# Altium PCB OPA847.PcbDoc
Units mil, origin at the board's own origin, x right, y up, seen from the top; angles counter-clockwise.
Board outline 1305 x 1265 mil, 2 copper layers (Top Layer, Bottom Layer); 20 components, 9 nets, 49 pads, 32 vias.
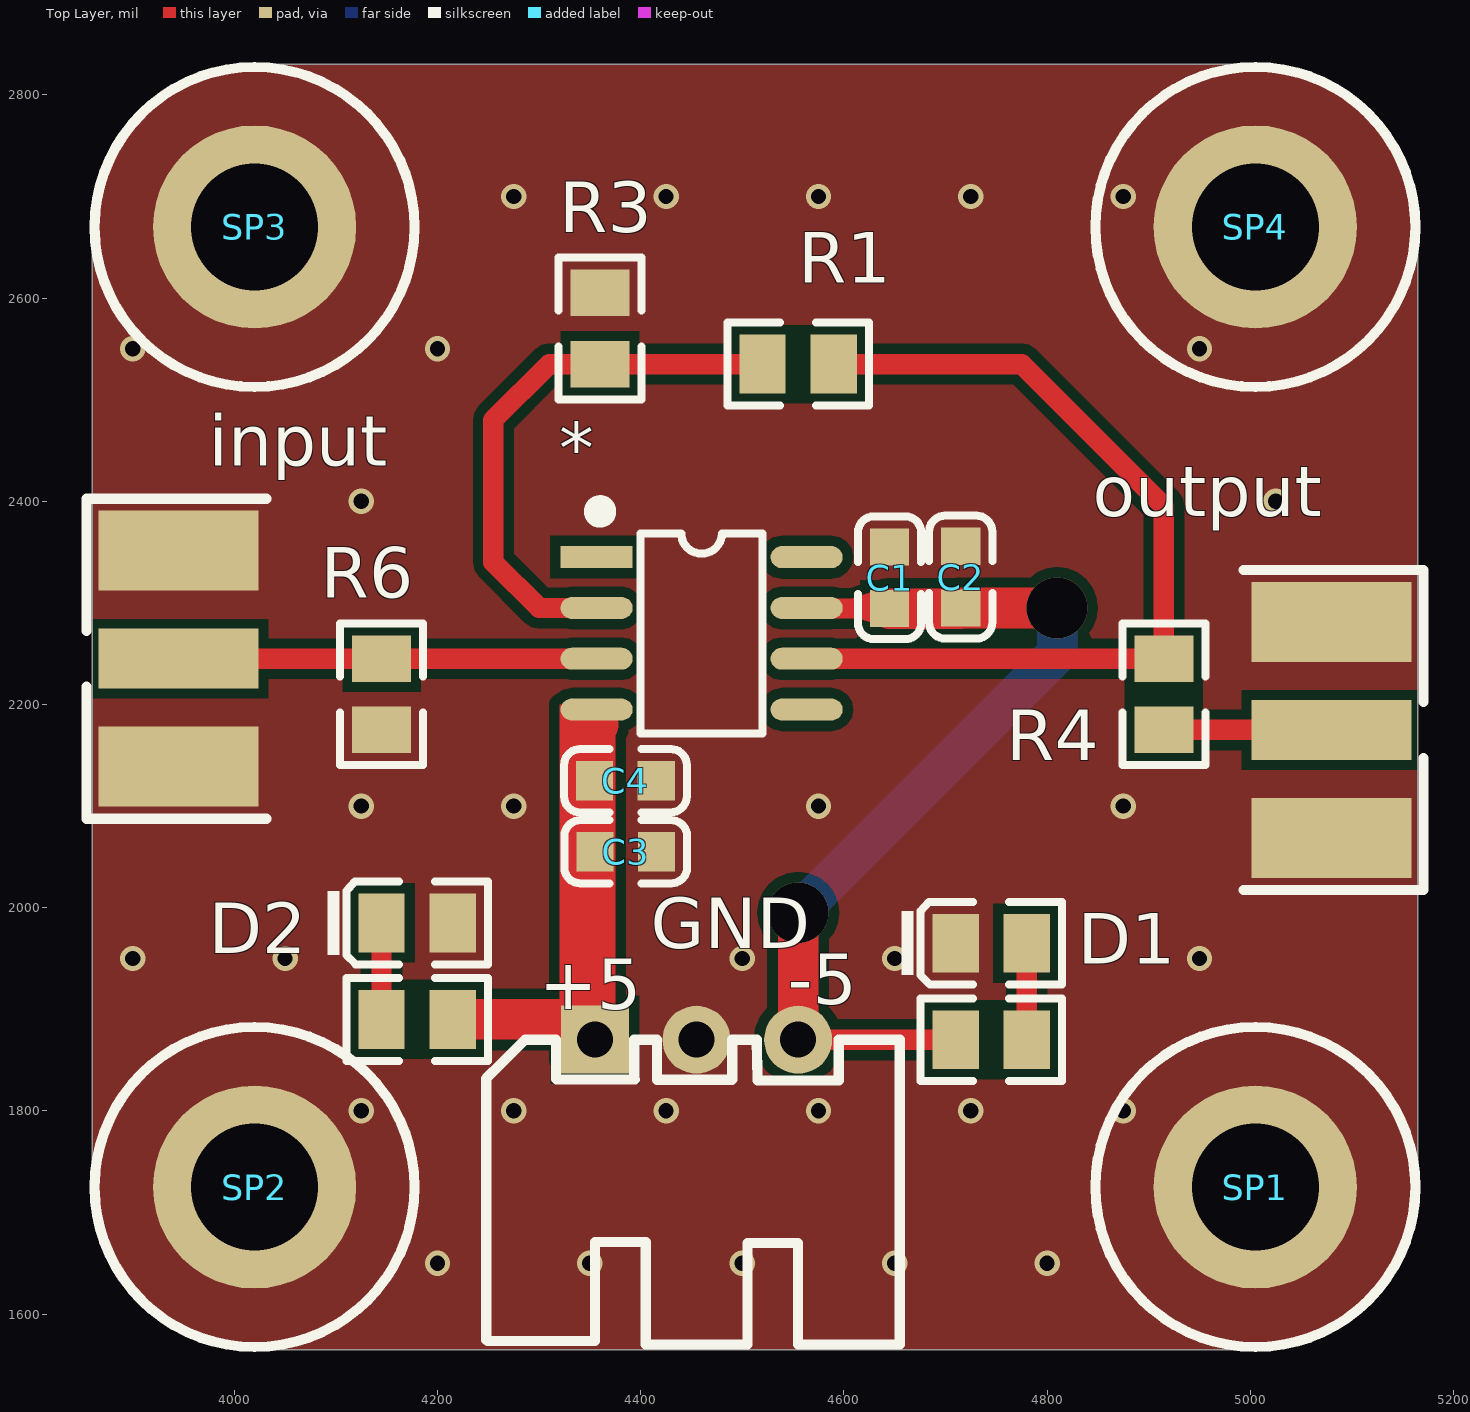
[diagram p0: Top Layer view]
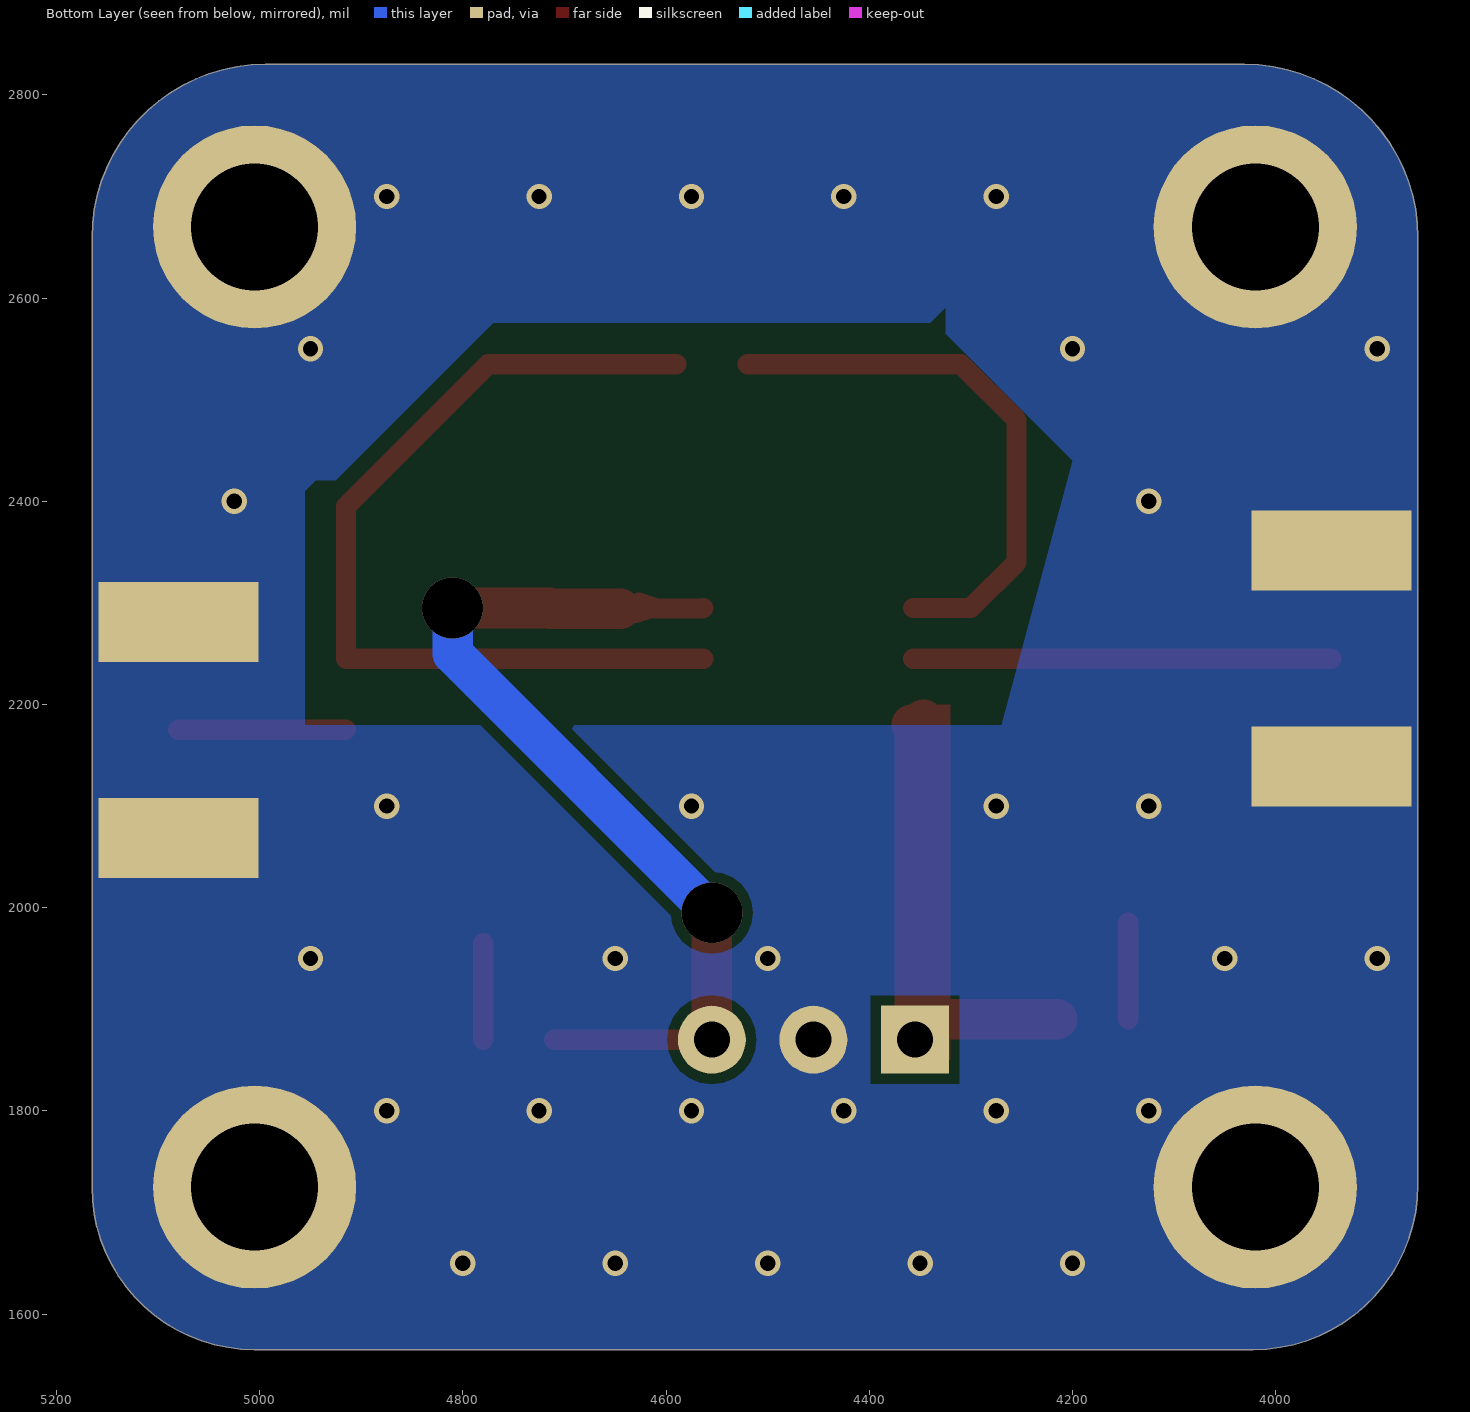
[diagram p1: Bottom Layer view, seen from below]
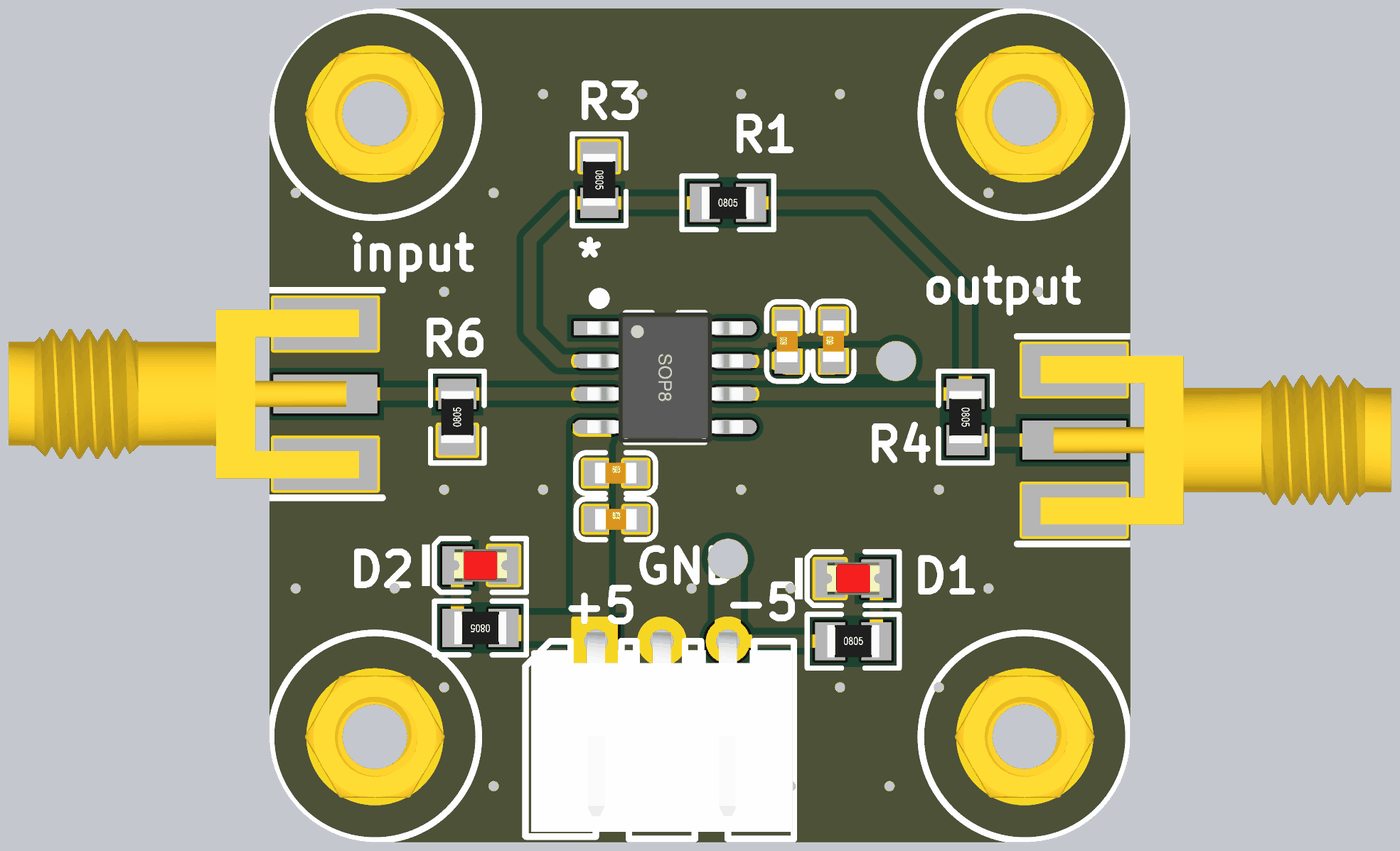
[diagram p2: 3D render of the assembled board from above, using the file's embedded part models]

## Layer stack, top to bottom
Top Solder: solder mask 0.4, Solder Resist, Dk 3.5
Top Layer: signal copper 1.4
Dielectric 1: dielectric 12.6, FR-4, Dk 4.8
Bottom Layer: signal copper 1.4
Bottom Solder: solder mask 0.4, Solder Resist, Dk 3.5

## Board outline
3860,1727.08 ccw(c4022.08,1727.08) 4022.08,1565 5005.19,1565 ccw(c5005.19,1724.81) 5165,1724.81 5165,2659.29 ccw(c4994.29,2659.29) 4994.29,2830 4030.71,2830 ccw(c4030.71,2659.29) 3860,2659.29

## Design rules (kind name [scope] priority, off if disabled: settings)
Clearance [All] p1: gap=10 ignorepadtopadclearanceinfootprint=FALSE except(0: Arc-Hole Track-Hole SMDPad-Hole THPad-Hole Via-Hole Fill-Hole Poly-Hole Region-Hole Text-Hole)
PolygonConnect [All] p1: connectstyle=Direct reliefconductorwidth=10 reliefentries=4 polygonreliefangle="90 Angle" airgapwidth=10
RoutingVias [All] p1: holewidth=28 width=50 viastyle="Through Hole" minholewidth=28 minwidth=50 maxholewidth=28 maxwidth=50
SolderMaskExpansion [All] p1: expansion=4
Width [All] p1: maxlimit=50 minlimit=10 preferedwidth=10 minimp=50.000000 maximp=50.000000 favimp=50.000000
30 further rules are at their usual default settings.

## Components (designator, comment, footprint, x,y, rotation, side; value= is the part's Value field where it differs from the comment)
* "Component_1" SOP8_N 4460,2270 r0 top
+5 "2KΩ (2001) ±1%" 0805_R 4180,1890 r180 top (schematic designator R5)
-5 "2KΩ (2001) ±1%" 0805_R 4745.04,1870 r0 top (schematic designator R2)
C1 "2.0pF (020) 0.25pF 50V" 0603_C 4645,2324.68 r90 top
C2 "2.0pF (020) 0.25pF 50V" 0603_C 4715,2325.32 r90 top
C3 "2.0pF (020) 0.25pF 50V" 0603_C 4385.31,2055 r0 top
C4 "2.0pF (020) 0.25pF 50V" 0603_C 4385,2125 r0 top
D1 "红灯 0805" 0805_LED_S1 4745,1965 r0 top
D2 "红灯 0805" 0805_LED_S1 4180,1985 r0 top
GND "HDR-1X3" XH2.54-WI-3P 4455,1870 r0 top (schematic designator JP3)
input "SMA WIFI 天线接口" SMA-KE 3945,2245 r90 top (schematic designator JP1)
output "SMA WIFI 天线接口" SMA-KE 5080,2175 r270 top (schematic designator JP2)
R1 "2KΩ (2001) ±1%" 0805_R 4554.96,2535 r0 top
R3 "2KΩ (2001) ±1%" 0805_R 4360,2570.04 r270 top
R4 "2KΩ (2001) ±1%" 0805_R 4915,2210.04 r270 top
R6 "2KΩ (2001) ±1%" 0805_R 4145,2209.96 r90 top
SP1 "M3铜柱" M3x4_L 5005,1725 r0 top
SP2 "M3铜柱" M3x4_L 4020,1725 r0 top
SP3 "M3铜柱" M3x4_L 4020,2670 r0 top
SP4 "M3铜柱" M3x4_L 5005,2670 r0 top

## Footprints (in the part's own frame and the unit in brackets; to place one, negate y for a bottom-side part, rotate by r counter-clockwise, add the part's x,y. Pads: shape width x height; smd on the part's side, far side on the other; paste and mask are expansions set on the pad)
0603_C [mm]
  rect 0.93x0.98 smd: 1(-0.77,0) 2(0.77,0)
  silkscreen extent -1.53,-0.79 1.54,0.79, body extent -0.8,-0.4 0.8,0.4, height 0.3
0805_LED_S1 [mm]
  rect 1.16x1.47 smd: A(0.89,0) K(-0.89,0)
  silkscreen extent -2.24,-1.04 1.77,1.03, body extent -1.01,-0.62 1.01,0.62, height 1.1
0805_R [mm]
  rect 1.16x1.47 smd: 1(-0.89,0) 2(0.89,0)
  silkscreen extent -1.77,-1.04 1.77,1.03, body extent -1,-0.62 1,0.63, height 0.49
M3x4_L [mil] "M3铜柱，长：4mm"
  round 200 hole 125: 1(0,0)
  silkscreen extent -157,-157 157,157, body extent -106,-93 106,93, height 159
SMA-KE [mm] "SMA 偏脚射频天线座     淘宝ID:黄晶宝石"
  rect 1.5x4 smd: 1(0,0)
  rect 2x4 smd: 2(-2.7,0) 2(2.7,0)
  rect 2x4 smd far side: 3(-2.7,0) 3(2.7,0)
  silkscreen extent -4,-2.2 4,2.3, body extent -3.25,-1.3 3.25,12.2, height 3.75
SOP8_N [mm] "5*6*1.8mm（长宽高）"
  rect 1.8x0.55 smd: 1(-2.625,1.905)
  oval 1.8x0.55 smd: 2(-2.625,0.635) 3(-2.625,-0.635) 4(-2.625,-1.905) 5(2.625,-1.905) 6(2.625,-0.635) 7(2.625,0.635) 8(2.625,1.905)
  silkscreen extent -2.69,-2.5 1.52,3.2, body extent -3,-2.5 3,2.5, height 1.9
XH2.54-WI-3P [mm] "接插件，3P"
  rect 1.7x1.7 hole 0.9: 1(-2.54,0)
  round 1.7 hole 0.9: 2(0,0) 3(2.54,0)
  silkscreen extent -5.26,-7.62 5.08,0, body extent -5.04,-7.35 5.04,0.35, height 5.73

## Part data
+5 -5 R1 R3 R4 R6: library part "0805 2KΩ (2001) 1%", "贴片电阻", Package=0805, SuppliersPartNumber=C17604, ComponentLink1Description=供应商链接, ComponentLink1URL=http://www.szlcsc.com/product/details_18292.html, Supplier=LC
C1 C2 C3 C4: library part "0603 2.0pF (020) 0.25pF 50V", "贴片电容", Package=0603, SuppliersPartNumber=C21895, ComponentLink1Description=供应商链接, ComponentLink1URL=http://www.szlcsc.com/product/details_22617.html, Supplier=LC
D1 D2: library part "0805 红灯", "发光二极管", Package=0805, SuppliersPartNumber=C2295, ComponentLink1Description=供应商链接, ComponentLink1URL=http://www.szlcsc.com/product/details_2668.html, Supplier=LC
GND: library part "Header 3", "3P接插件", BOM名称=3P接插件
input output: library part SMA, "SMA-2.4G射频天线接口"
SP1 SP2 SP3 SP4: library part 铜柱小焊盘, "铜柱"

## Via types
v1: diameter 25, hole 15, Top Layer to Bottom Layer, tented both sides, 30 vias
v2: diameter 60, hole 60, Top Layer to Bottom Layer, tented both sides, 2 vias

## Nets (pads, with @x,y where several pads share a name; then routed paths per layer and width w, separated by ;. In a path a pad name is that pad's centre, name@x,y a point inside that pad or via, vN(x,y) a via of type N, cw(c..) or ccw(c..) an arc to the next point about the centre after c; other vN are vias at no path point)
+5: *.7 -5.1 C1.1 C2.1 GND.3 | length 932.8
  Top Layer w20: GND.3 -5.1 ; *.7 4563.98,2294.37 C1.1
  Top Layer w40: GND.3 v2(4555,1995) ; C1.1 4714.37,2294.37 C2.1 v2(4810,2295)
  Bottom Layer w40: v2(4555,1995) 4810,2250 v2(4810,2295)
-5: *.4 +5.1 C3.1 C4.1 GND.1 | length 471.4
  Top Layer w40: +5.1 4335,1890 GND.1 C3.1 4355,2176.65 ; *.4@4346.65,2185 4355,2176.65 ; 4358.35,2180 4355,2176.65
GND: C1.2 C2.2 C3.2 C4.2 D1.K D2.A GND.2 input.2 input.3 output.2 output.3 R3.1 R6.1 SP1.1 SP2.1 SP3.1 SP4.1
  other v1: 4200,1650 4350,1650 4500,1650 4650,1650 4800,1650 4125,1800 4275,1800 4425,1800 4575,1800 4725,1800 4875,1800 3900,1950 4050,1950 4500,1950 4650,1950 4950,1950 4125,2100 4275,2100 4575,2100 4875,2100 4125,2400 5025,2400 3900,2550 4200,2550 4950,2550 4275,2700 4425,2700 4575,2700 4725,2700 4875,2700
INPUT: *.3 input.1 R6.2 | length 411.7
  Top Layer w20: input.1 R6.2 *.3
Net*_2: *.2 R1.1 R3.2 | length 548
  Top Layer w20: *.2 4300,2295 4255,2340 4255,2480 4310,2535 R3.2 R1.1
Net*_6: *.6 R1.2 R4.1 | length 884.6
  Top Layer w20: *.6 4914.92,2245 R4.1 4915,2395 4775,2535 R1.2
NetD1_A: -5.2 D1.A | length 95
  Top Layer w20: D1.A 4780.04,1870.04 -5.2
NetD2_K: +5.2 D2.K | length 95
  Top Layer w20: +5.2 D2.K
OUTput: output.1 R4.2 | length 165
  Top Layer w20: R4.2 output.1
pads on no net: *.1 *.5 *.8

## Polygon pours and split planes (outlines as drawn)
GND on Top Layer "Top Layer-No Net" (solid, pour order 2): 3860,1727.08 ccw(c4022.08,1727.08) 4022.08,1565 5005.19,1565 ccw(c5005.19,1724.81) 5165,1724.81 5165,2659.29 ccw(c4994.29,2659.29) 4994.29,2830 4030.71,2830 ccw(c4030.71,2659.29) 3860,2659.29
GND on Bottom Layer "Top Layer-No Net1" (solid, pour order 3): 3860,1727.08 ccw(c4022.08,1727.08) 4022.08,1565 5005.19,1565 ccw(c5005.19,1724.81) 5165,1724.81 5165,2659.29 ccw(c4994.29,2659.29) 4994.29,2830 4030.71,2830 ccw(c4030.71,2659.29) 3860,2659.29

## Other copper
Top Layer:
  rectangle net -5: 4320,1850 4340,2200
  rectangle net -5: 4320,1860 4365,1865
  region net +5: 4580,2295 4580.63,2294.37 4644.37,2294.37 4630,2280
  region net +5: 4580,2295 4580.63,2294.37 4645,2294.37 4629.37,2310 4625,2310
  region net +5: 4615,2295
  region: 4580,2295
Bottom Layer:
  pour cut-out: 4270,2180 4955,2180 4955,2410 4945,2420 4925,2420 4770,2575 4340,2575 4325,2590 4325,2565 4200,2440
  pour cut-out: 4205,2270

## Silkscreen, mask and mechanical layers (free items; w line width, h text height)
Mechanical 1:
  lines w10: 3860,1727.08 ccw(c4022.08,1727.08) 4022.08,1565 4205,1565 5005.19,1565 ccw(c5005.19,1724.81) 5165,1724.81 5165,2659.29 ccw(c4994.29,2659.29) 4994.29,2830 4320,2830 4030.71,2830 ccw(c4030.71,2659.29) 3860,2659.29 3860,2605 3860,1727.08